# EAGLE board Candidacy part 1 (EAGLE 9.6.2)
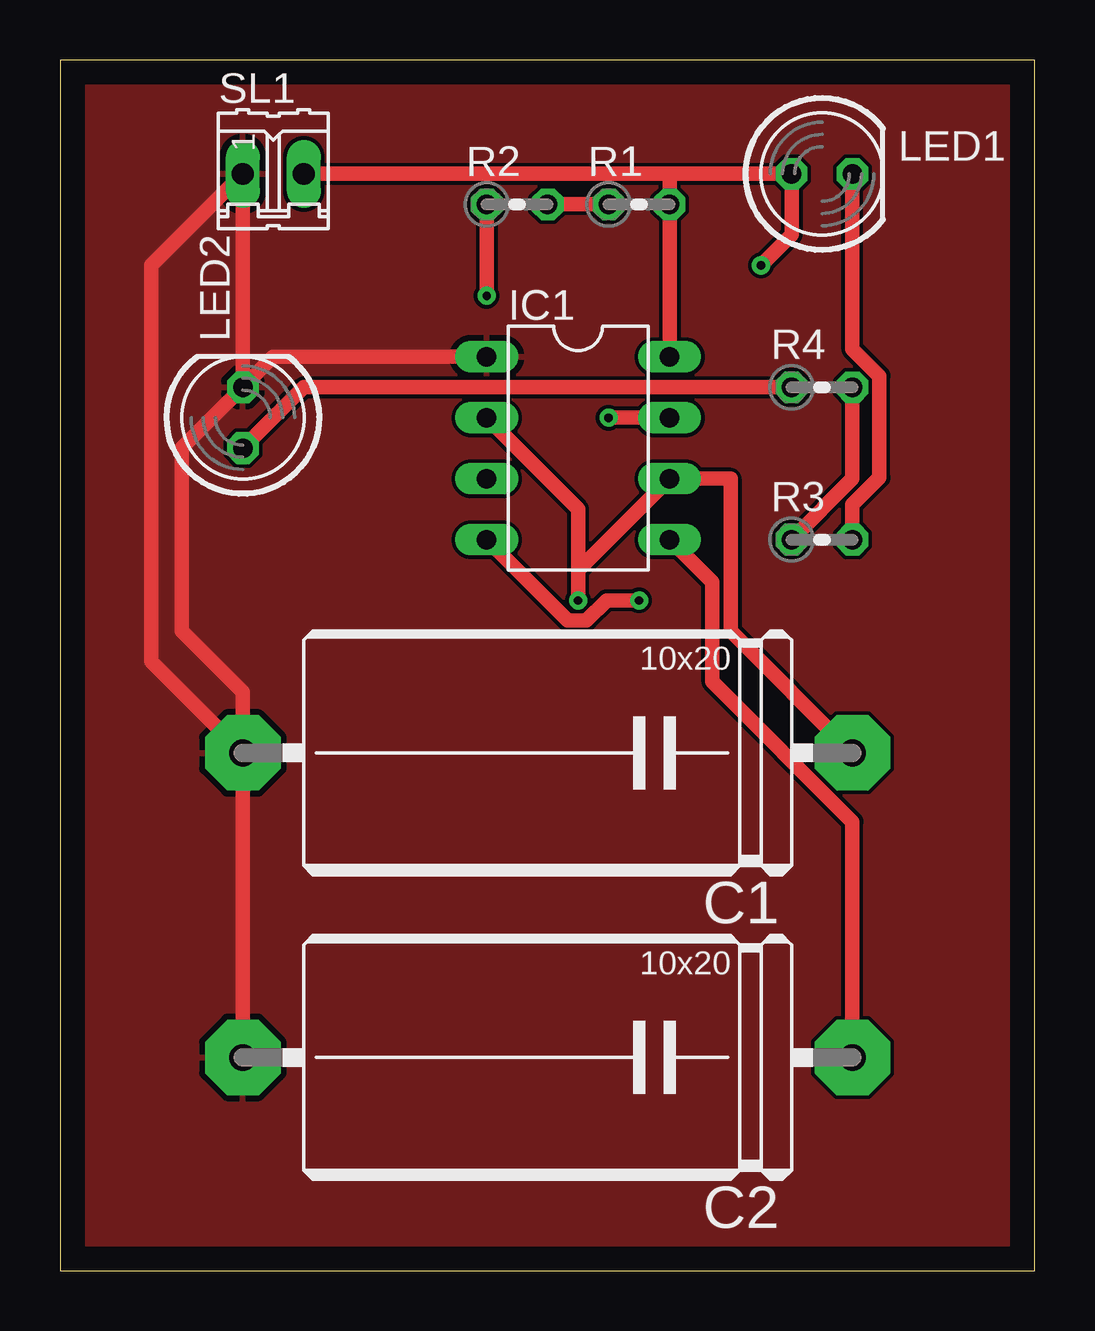
[diagram p0: board, top side]
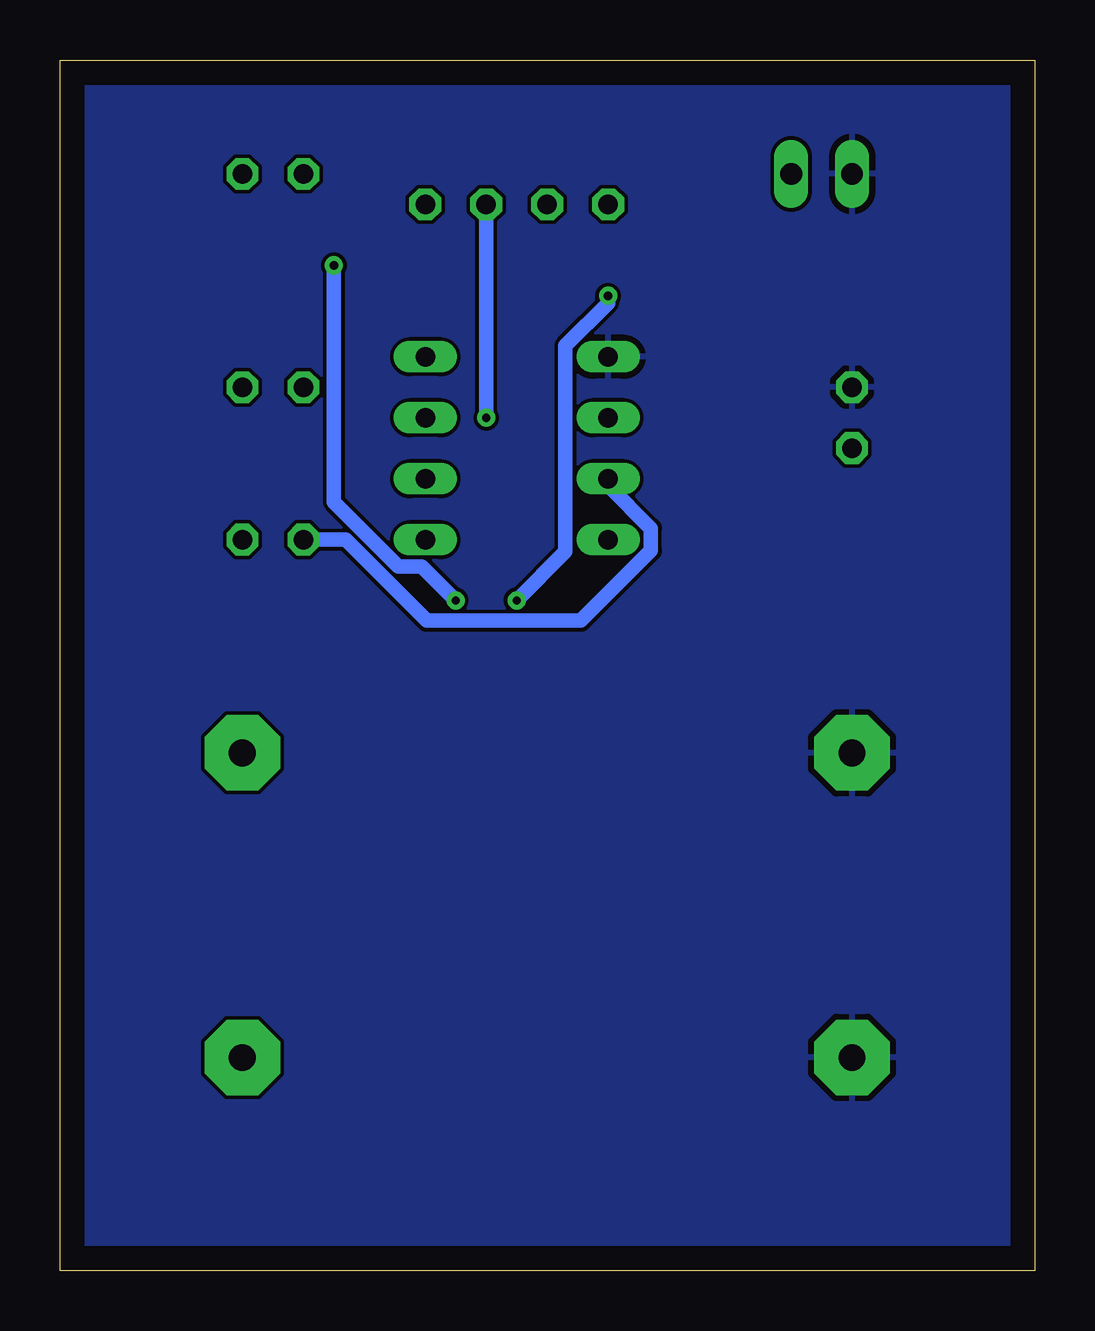
[diagram p1: board, bottom side, seen from below]

Size 40.62 x 50.47 mm. Coordinates in mm from the lower left corner, seen from the top.
Outline: 0,0 40.62,0 40.62,50.47 0,50.47 0,0
Copper layers (1*16): Top 0.035mm / dielectric 1.5mm / Bottom 0.035mm
Design rules "default": minimum track width 6mil, minimum drill 0.35mm, track to track 6mil, track to pad 6mil, pad to pad 6mil, via to via 6mil, smd to smd 6mil, copper to edge 40mil, drill to drill 6mil, minimum pad ring 10mil, minimum via ring 8mil, stop-mask expansion 4mil, vias tented up to drill 0mil, thermal gap 10mil

## Footprints (pad centres in the part's own frame; a part is rotated, then mirrored left to right if it is on the bottom)
EU25-10 = drill 1.118 pad 3.15 octagon: 1 -12.7,0; 2 12.7,0
DIL-08 = drill 0.813 long: 1 -3.81,-3.81; 2 -1.27,-3.81; 3 1.27,-3.81; 4 3.81,-3.81; 5 3.81,3.81; 6 1.27,3.81; 7 -1.27,3.81; 8 -3.81,3.81
LED5MM = drill 0.813 octagon: A -1.27,0; K 1.27,0
0204V = drill 0.813 octagon: 1 -1.27,0; 2 1.27,0
02P = drill 0.914 long: 1 -1.27,0; 2 1.27,0

## Placement (x,y rotation side)
C1  1u  [EU25-10]  20.32,21.59 180 top
C2  10n  [EU25-10]  20.32,8.89 180 top
IC1  NE555  [DIL-08]  21.59,34.29 270 top
LED1  Red  [LED5MM]  31.75,45.72 0 top
LED2  Red  [LED5MM]  7.62,35.56 90 top
R1  1k  [0204V]  24.13,44.45 0 top
R2  470k  [0204V]  19.05,44.45 0 top
R3  220k  [0204V]  31.75,30.48 0 top
R4  220k  [0204V]  31.75,36.83 0 top
SL1  9v  [02P]  8.89,45.72 0 top

## Library data of the parts
C1 C2 = rcl; SPICEPREFIX: C
IC1 = st-microelectronics; MF: Arrow Electronics; MPN: NE555N; OC_FARNELL: 1467742; OC_NEWARK: 89K1486
LED1 LED2 = led
R1-R4 = rcl; SPICEPREFIX: R
SL1 = con-amp-quick; OC_FARNELL: unknown; OC_NEWARK: unknown

## Nets
GND: C1.2 C2.2 IC1.1 LED2.K SL1.1
N$1: IC1.3 R3.1 R4.2
N$3: LED1.K R3.2
N$4: LED2.A R4.1
N$7: C1.1 IC1.2 IC1.6 R2.1
N$9: IC1.7 R1.1 R2.2
N$10: C2.1 IC1.5
VCC+: IC1.4 IC1.8 LED1.A R1.2 SL1.2

## Tracks (layer width: path | path; a pad name or v marks a point on that pad's centre or on a via)
GND
  Top 0.61: C1.2 3.81,25.4 3.81,41.91 SL1.1 LED2.K | C1.2 C2.2 | LED2.K 5.08,34.29 5.08,26.67 7.62,24.13 C1.2 | LED2.K 8.89,38.1 IC1.1
  pour Top (isolate 0): 0,0 0,50.8 40.64,50.8 40.64,0
  pour Bottom (isolate 0): 0,0 0,50.8 40.64,50.8 40.64,0
N$1
  Top 0.61: R4.2 33.02,33.02 R3.1
  Bottom 0.61: R3.1 28.72,30.48 25.34,27.1 18.91,27.1 16,30.02 16,30.94 17.78,32.72 IC1.3
N$3
  Top 0.61: R3.2 33.02,31.94 34.14,33.06 34.14,37.29 33.02,38.41 LED1.K
N$4
  Top 0.61: LED2.A 10.16,36.83 R4.1
N$7  (via drill 0.35)
  Top 0.61: R2.1 v17.78,40.64 | v21.59,27.94 21.59,29.21 | 21.59,29.21 IC1.6 27.94,33.02 27.94,26.67 C1.1 | 21.59,29.21 21.59,31.75 IC1.2
  Bottom 0.61: v17.78,40.64 17.78,40.34 19.56,38.56 19.56,29.97 v21.59,27.94
N$9  (via drill 0.35)
  Top 0.61: R1.1 R2.2 | IC1.7 v22.86,35.56
  Bottom 0.61: v22.86,35.56 R1.1
N$10
  Top 0.61: IC1.5 27.18,28.7 27.18,24.56 33.02,18.72 C2.1
VCC+  (via drill 0.35)
  Top 0.61: SL1.2 25.4,45.72 | 25.4,45.72 LED1.A 30.48,43.18 v29.21,41.91 | 25.4,45.72 R1.2 IC1.8 | v24.13,27.94 22.77,27.94 21.94,27.1 21.16,27.1 IC1.4
  Bottom 0.61: v24.13,27.94 25.55,29.36 26.52,29.36 29.21,32.05 v29.21,41.91